# EAGLE board matrix_buttons_body (EAGLE 9.0.1)
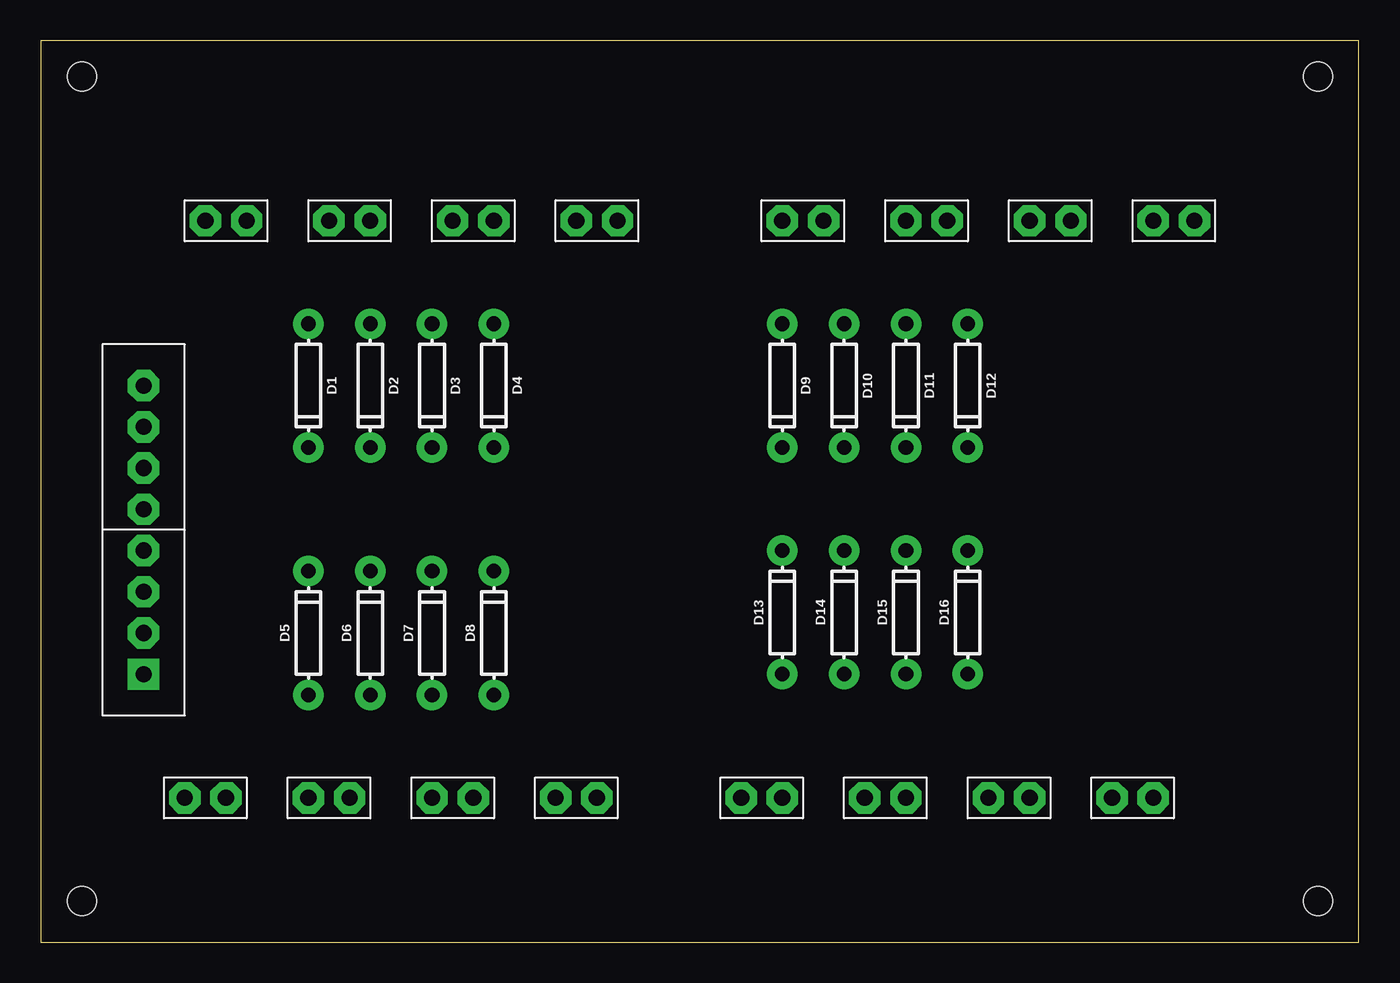
[diagram p0: board, top side]
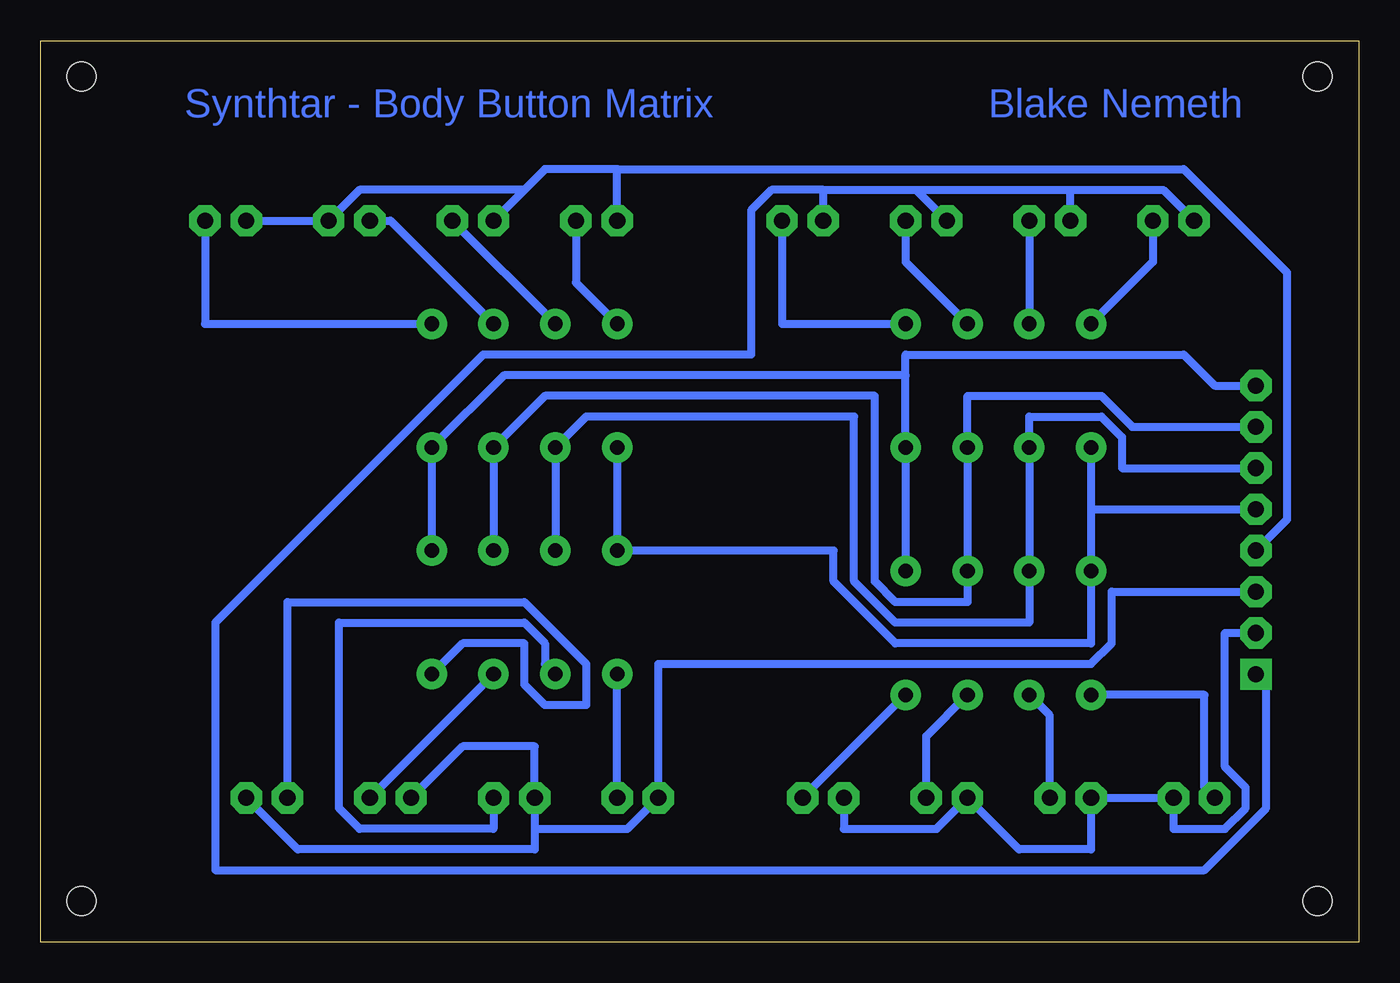
[diagram p1: board, bottom side, seen from below]

Size 81.26 x 55.55 mm. Coordinates in mm from the lower left corner, seen from the top.
Outline: 0,0 81.26,0 81.26,55.55 0,55.55 0,0
Copper layers (1*16): Top 0.035mm / dielectric 1.5mm / Bottom 0.035mm
Design rules "default": minimum track width 6mil, minimum drill 0.35mm, track to track 6mil, track to pad 6mil, pad to pad 6mil, via to via 6mil, smd to smd 6mil, copper to edge 40mil, drill to drill 6mil, minimum pad ring 10mil, minimum via ring 8mil, stop-mask expansion 4mil, vias tented up to drill 0mil, thermal gap 10mil
Net classes: 0 default: width 0.508 mm, clearance 0.381 mm
Holes 1.78 mm at 2.54,53.34 78.74,53.34 78.74,2.54 2.54,2.54

## Footprints (pad centres in the part's own frame; a part is rotated, then mirrored left to right if it is on the bottom)
DIODE-1N4148 = drill 0.9 pad 1.88: A -3.81,0; C 3.81,0
2-PIN-HEADER = drill 1 pad 1.93 octagon: P$1 -1.27,0; P$2 1.27,0
8-PIN-HEADER = drill 1 pad 1.93 square: P$1 -8.89,0 | drill 1 pad 1.93 octagon: P$2 -6.35,0; P$3 -3.81,0; P$4 -1.27,0; P$5 1.27,0; P$6 3.81,0; P$7 6.35,0; P$8 8.89,0

## Placement (x,y rotation side)
D1  200mA/100V/1V  [DIODE-1N4148]  16.51,34.29 270 top
D2  200mA/100V/1V  [DIODE-1N4148]  20.32,34.29 270 top
D3  200mA/100V/1V  [DIODE-1N4148]  24.13,34.29 270 top
D4  200mA/100V/1V  [DIODE-1N4148]  27.94,34.29 270 top
D5  200mA/100V/1V  [DIODE-1N4148]  16.51,19.05 90 top
D6  200mA/100V/1V  [DIODE-1N4148]  20.32,19.05 90 top
D7  200mA/100V/1V  [DIODE-1N4148]  24.13,19.05 90 top
D8  200mA/100V/1V  [DIODE-1N4148]  27.94,19.05 90 top
D9  200mA/100V/1V  [DIODE-1N4148]  45.72,34.29 270 top
D10  200mA/100V/1V  [DIODE-1N4148]  49.53,34.29 270 top
D11  200mA/100V/1V  [DIODE-1N4148]  53.34,34.29 270 top
D12  200mA/100V/1V  [DIODE-1N4148]  57.15,34.29 270 top
D13  200mA/100V/1V  [DIODE-1N4148]  45.72,20.32 90 top
D14  200mA/100V/1V  [DIODE-1N4148]  49.53,20.32 90 top
D15  200mA/100V/1V  [DIODE-1N4148]  53.34,20.32 90 top
D16  200mA/100V/1V  [DIODE-1N4148]  57.15,20.32 90 top
U$1  2-PIN-HEADER  [2-PIN-HEADER]  11.43,44.45 0 top
U$2  2-PIN-HEADER  [2-PIN-HEADER]  19.05,44.45 0 top
U$3  2-PIN-HEADER  [2-PIN-HEADER]  26.67,44.45 0 top
U$4  2-PIN-HEADER  [2-PIN-HEADER]  34.29,44.45 0 top
U$5  2-PIN-HEADER  [2-PIN-HEADER]  10.16,8.89 180 top
U$6  2-PIN-HEADER  [2-PIN-HEADER]  17.78,8.89 0 top
U$7  2-PIN-HEADER  [2-PIN-HEADER]  25.4,8.89 0 top
U$8  2-PIN-HEADER  [2-PIN-HEADER]  33.02,8.89 0 top
U$9  2-PIN-HEADER  [2-PIN-HEADER]  46.99,44.45 0 top
U$10  2-PIN-HEADER  [2-PIN-HEADER]  54.61,44.45 0 top
U$11  2-PIN-HEADER  [2-PIN-HEADER]  62.23,44.45 180 top
U$12  2-PIN-HEADER  [2-PIN-HEADER]  69.85,44.45 0 top
U$13  2-PIN-HEADER  [2-PIN-HEADER]  44.45,8.89 0 top
U$14  2-PIN-HEADER  [2-PIN-HEADER]  52.07,8.89 0 top
U$15  2-PIN-HEADER  [2-PIN-HEADER]  59.69,8.89 0 top
U$16  2-PIN-HEADER  [2-PIN-HEADER]  67.31,8.89 180 top
U$17  8-PIN-HEADER  [8-PIN-HEADER]  6.35,25.4 90 top

## Library data of the parts
D1-D16 = SparkFun-DiscreteSemi; PROD_ID: DIO-08378
U$1-U$17 = mask_lbr

## Nets
ADD_BTNS: U$9.P$1 U$10.P$1 U$11.P$1 U$12.P$1 U$17.P$4
B_ROW_1: D1.C D5.C D9.C D13.C U$17.P$5
B_ROW_2: D2.C D6.C D10.C D14.C U$17.P$6
B_ROW_3: D3.C D7.C D11.C D15.C U$17.P$7
B_ROW_4: D4.C D8.C D12.C D16.C U$17.P$8
BODY_BTNS: U$1.P$1 U$2.P$1 U$3.P$1 U$4.P$1 U$17.P$1
MENU_BTNS: U$5.P$1 U$6.P$1 U$7.P$1 U$8.P$1 U$17.P$2
N$1: D11.A U$11.P$2
N$2: D12.A U$12.P$2
N$6: D9.A U$9.P$2
N$7: D10.A U$10.P$2
N$24: D5.A U$5.P$2
N$31: D6.A U$6.P$2
N$33: D7.A U$7.P$2
N$34: D8.A U$8.P$2
N$35: D1.A U$1.P$2
N$37: D2.A U$2.P$2
N$38: D3.A U$3.P$2
N$39: D4.A U$4.P$2
N$41: D13.A U$13.P$2
N$42: D14.A U$14.P$2
N$43: D15.A U$15.P$2
N$44: D16.A U$16.P$2
QUIK_BTNS: U$13.P$1 U$14.P$1 U$15.P$1 U$16.P$1 U$17.P$3

## Tracks (layer width: path | path; a pad name or v marks a point on that pad's centre or on a via)
ADD_BTNS
  Bottom 0.508: U$12.P$1 U$11.P$1 61.59,46.35 51.44,46.35 | U$17.P$4 4.45,26.03 4.45,41.27 10.79,47.62 45.72,47.62 | U$9.P$1 45.72,47.62 | 51.44,46.35 50.16,47.62 45.72,47.62 | 51.44,46.35 U$10.P$1
B_ROW_1
  Bottom 0.508: D9.C D13.C 32.38,24.13 32.38,22.22 28.57,18.41 16.51,18.41 D5.C 16.51,26.67 | D1.C 16.51,26.67 | 16.51,26.67 U$17.P$5
B_ROW_2
  Bottom 0.508: D14.C D10.C 47.62,32.38 31.11,32.38 31.11,22.22 28.57,19.68 20.32,19.68 D6.C D2.C 20.32,32.38 15.88,32.38 14.61,31.12 14.61,29.21 U$17.P$6
B_ROW_3
  Bottom 0.508: D15.C D11.C 50.16,33.66 29.84,33.66 29.84,22.22 28.57,20.95 24.13,20.95 D7.C D3.C 24.13,33.66 15.88,33.66 13.97,31.75 U$17.P$7
B_ROW_4
  Bottom 0.508: D16.C D12.C 52.7,34.92 27.94,34.92 | D8.C D4.C 27.94,34.92 | U$17.P$8 8.89,34.29 10.79,36.2 27.94,36.2 27.94,34.92
BODY_BTNS
  Bottom 0.508: U$1.P$1 12.06,46.35 17.78,46.35 | U$2.P$1 17.78,46.35 | U$17.P$1 5.71,15.88 5.71,8.25 9.53,4.45 70.48,4.45 70.48,19.68 53.98,36.2 37.47,36.2 37.47,45.09 36.2,46.35 33.02,46.35 | U$4.P$1 33.02,46.35 | 27.3,46.35 U$3.P$1 | 33.02,46.35 27.3,46.35 | 27.3,46.35 17.78,46.35
MENU_BTNS
  Bottom 0.508: U$8.P$1 31.75,6.98 26.04,6.98 U$7.P$1 20.95,5.71 16.51,5.71 U$6.P$1 U$5.P$1 11.43,6.98 8.26,6.98 6.99,8.25 6.99,9.52 8.26,10.79 8.26,19.05 U$17.P$2
N$1
  Bottom 0.508: D11.A 59.69,44.45 U$11.P$2
N$2
  Bottom 0.508: D12.A 71.12,38.1 U$12.P$2
N$6
  Bottom 0.508: D9.A 48.26,40.64 U$9.P$2
N$7
  Bottom 0.508: U$10.P$2 D10.A
N$24
  Bottom 0.508: D5.A 9.53,15.24 9.53,9.52 U$5.P$2
N$31
  Bottom 0.508: D6.A 19.05,13.97 U$6.P$2
N$33
  Bottom 0.508: D7.A 26.67,12.7 U$7.P$2
N$34
  Bottom 0.508: U$8.P$2 D8.A
N$35
  Bottom 0.508: D1.A 12.7,41.91 U$1.P$2
N$37
  Bottom 0.508: U$2.P$2 D2.A
N$38
  Bottom 0.508: D3.A 27.94,41.91 U$3.P$2
N$39
  Bottom 0.508: D4.A 35.56,38.1 U$4.P$2
N$41
  Bottom 0.508: U$13.P$2 D13.A
N$42
  Bottom 0.508: D14.A 50.16,17.14 50.16,18.41 51.44,19.68 62.87,19.68 62.87,8.25 61.59,6.98 53.34,6.98 U$14.P$2
N$43
  Bottom 0.508: U$15.P$2 D15.A
N$44
  Bottom 0.508: D16.A 55.24,18.41 51.44,18.41 51.44,15.88 50.16,14.61 47.62,14.61 47.62,17.14 51.44,20.95 66.04,20.95 U$16.P$2
QUIK_BTNS
  Bottom 0.508: 50.8,6.98 45.09,6.98 U$13.P$1 43.18,17.14 16.51,17.14 15.24,18.41 15.24,21.59 U$17.P$3 | 50.8,6.98 U$14.P$1 50.8,12.06 55.24,12.06 U$15.P$1 | U$16.P$1 65.41,5.71 50.8,5.71 50.8,6.98

## Text on the board
Bottom: Blake Nemeth | Synthtar - Body Button Matrix